# Altium PCB Electron.PcbDoc
Units mil, origin at the board's own origin, x right, y up, seen from the top; angles counter-clockwise.
Board outline 310 x 393.7 mil, 2 copper layers (Top1, Bottom2), stack 42.204 mil thick; 4 components, 28 nets, 68 pads, 19 vias.
Unrouted connection lines stored in the file: 8.
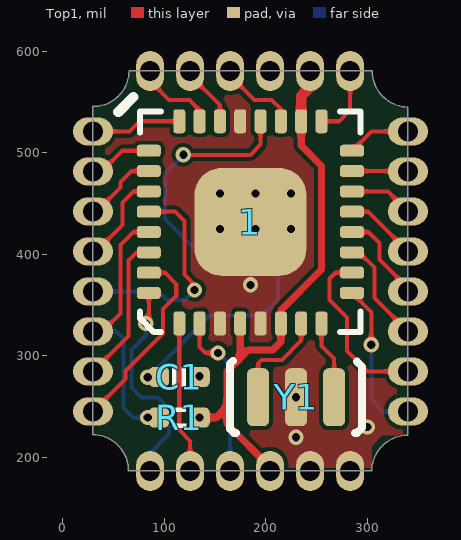
[diagram p0: Top1 view]
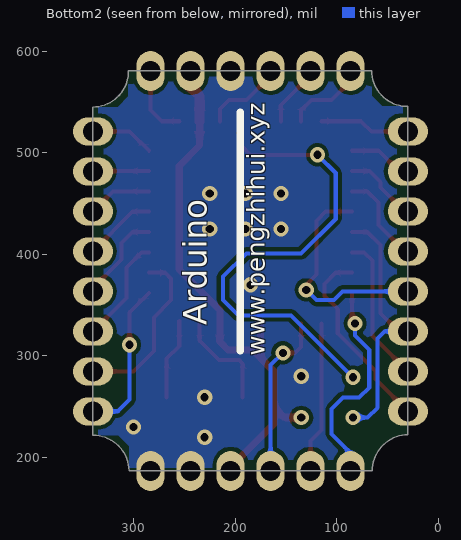
[diagram p1: Bottom2 view, seen from below]
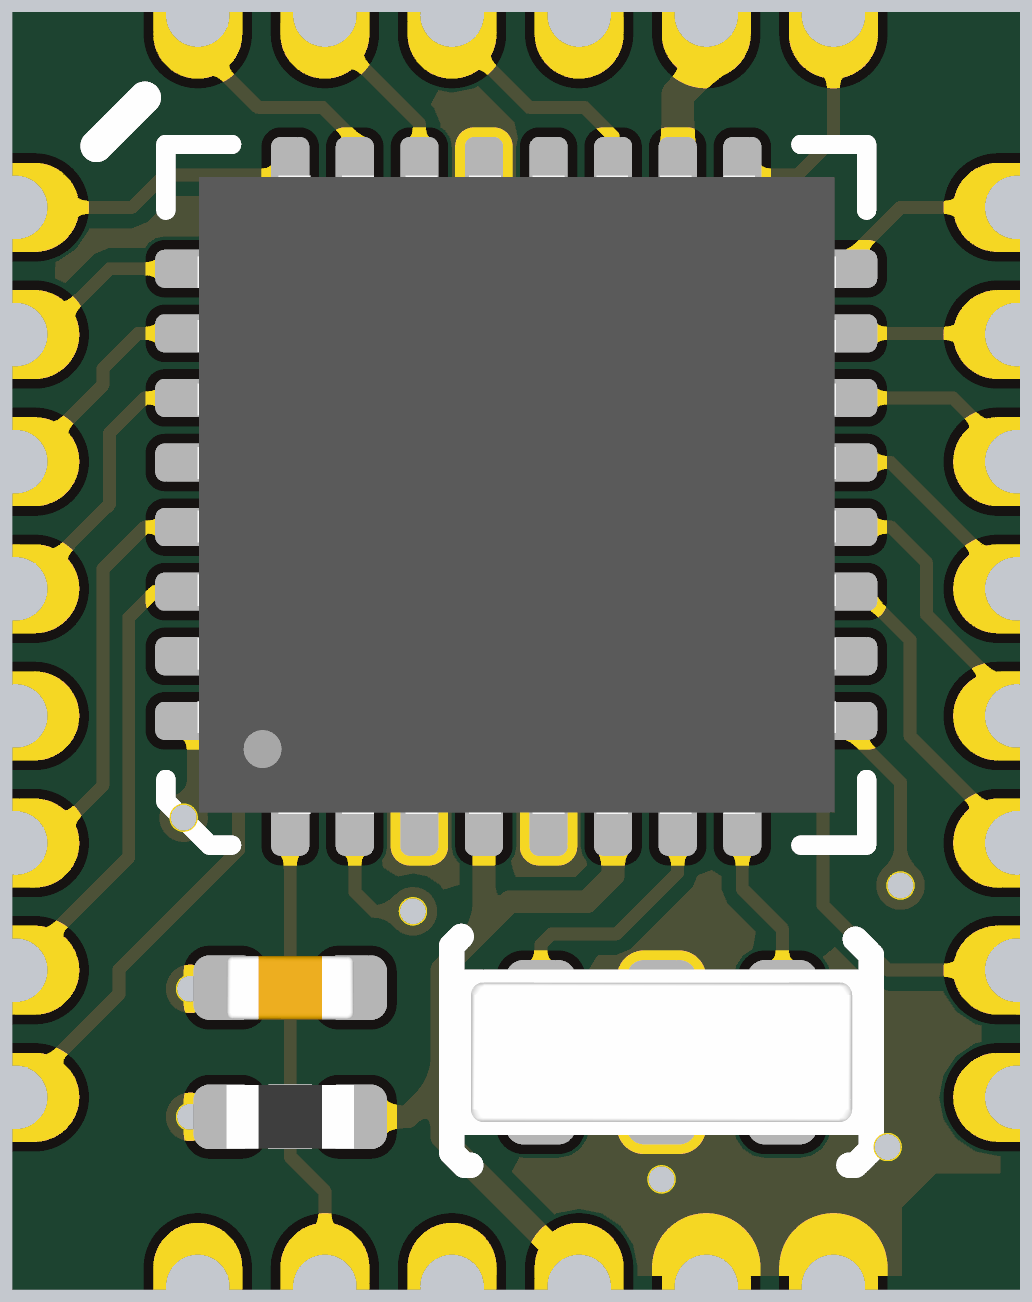
[diagram p2: 3D render of the assembled board from above, using the file's embedded part models]

## Layer stack, top to bottom
Top Solder: solder mask 0.394, Solder Resist, Dk 3.5
Top1: signal copper 1.417
Dielectric1: prepreg 39.3701, PP-006, Dk 4.1
Bottom2: signal copper 1.417
Bottom Solder: solder mask 0.394, Solder Resist, Dk 3.5

## Board outline
30,222.4 cw(c29.72,187.13) 65,186.85 304.45,186.85 cw(c339.72,186.57) 340,221.85 340,545 cw(c340.28,580.28) 305,580.55 65.55,580.55 cw(c30.28,580.83) 30,545.55

## Design rules (kind name [scope] priority, off if disabled: settings)
Clearance [All] p1: gap=4 ignorepadtopadclearanceinfootprint=FALSE except(0: Arc-Hole Track-Hole SMDPad-Hole THPad-Hole Via-Hole Fill-Hole Poly-Hole Region-Hole Text-Hole)
ComponentClearance [All] p1: gap=0 collisioncheckmode=3 verticalgap=0 showdistances=FALSE
DiffPairsRouting [All] p1: maxlimit=9 minlimit=9 mostfreqgap=9 toplayer_minwidth=15 toplayer_maxwidth=15 toplayer_prefwidth=15 bottomlayer_minwidth=15 bottomlayer_maxwidth=15 bottomlayer_prefwidth=15 maxuncoupledlength=500
FanoutControl Fanout_BGA [All] p1: bgadir=Out bgaviamode=Centered fanoutstyle=Auto fanoutdirection=Alternating viagrid=1 // Fanout_BGA (Default Rule)
HoleSize [All] p1: absolutevalues=TRUE maxlimit=10000 minlimit=8 maxpercent=80.000 minpercent=20.000
MinimumSolderMaskSliver [All] p1 off: minsoldermaskwidth=2
PlaneClearance [All] p1: clearance=8
PlaneConnect [All] p1: planeconnectstyle=Direct reliefexpansion=20 reliefentries=4 reliefconductorwidth=10 reliefairgap=10
PolygonConnect [All] p1: connectstyle=Direct reliefconductorwidth=10 reliefentries=4 polygonreliefangle="90 Angle" airgapwidth=10
RoutingVias [All] p1: holewidth=8 width=16 viastyle="Through Hole" minholewidth=6 minwidth=12 maxholewidth=28 maxwidth=50
SilkToSilkClearance [All] p1: silktosilkclearance=0
SilkToSolderMaskClearance [IsPad] p1: minsilkscreentomaskgap=0 clearancetoexposedcopper=TRUE
SolderMaskExpansion [All] p1: expansion=3
Width GND [(InNet('AGND') OR InNet('GND'))] p1: maxlimit=50 minlimit=4 preferedwidth=10
Width VCC [(InNet('VDD_SYS_3.3V') OR InNet('VDD_AV_3.3V') OR InNet('VDD_5V') OR InNet('VDD1V2-SYS') OR InNet('VDD1V1-EPHY') OR InNet('VDD-CPUX') OR InNet('VDD-CPUS') OR InNet('VDD-CPUFB') OR InNet('VCC-DRAM'))] p2: maxlimit=50 minlimit=4 preferedwidth=10
Width [All] p3: maxlimit=10000 minlimit=4 preferedwidth=4
21 further rules are at their usual default settings.

## Components (designator, comment, footprint, x,y, rotation, side; value= is the part's Value field where it differs from the comment)
1 "ATmega328P" QFN-32 185,432 r90 top
C1 "0.1uF" CAP_0402 115,279.37 r0 top value=0.1u
R1 "10K" RES_0402 115,239.37 r0 top value=22R
Y1 "8/16MHz" 晶振-3P 230,259.37 r0 top

## Footprints (in the part's own frame and the unit in brackets; to place one, negate y for a bottom-side part, rotate by r counter-clockwise, add the part's x,y. Pads: shape width x height; smd on the part's side, far side on the other; paste and mask are expansions set on the pad)
CAP_0402 [mil]
  rrect50% 20x20 smd: 1(-20,0) 2(20,0)
  silkscreen extent -6,-9 6,9, body extent -20,-10 20,10, height 20
QFN-32 [mm]
  rrect50% 0.6x0.3 smd: 1(-2.54,1.778) 2(-2.54,1.27) 3(-2.54,0.762) 4(-2.54,0.254) 5(-2.54,-0.254) 6(-2.54,-0.762) 7(-2.54,-1.27) 8(-2.54,-1.778) 17(2.515,-1.778) 18(2.515,-1.27) 19(2.515,-0.762) 20(2.515,-0.254) 21(2.515,0.254) 22(2.515,0.762) 23(2.515,1.27) 24(2.515,1.778)
  rrect50% 0.3x0.6 smd: 9(-1.778,-2.54) 10(-1.27,-2.54) 11(-0.762,-2.54) 12(-0.254,-2.54) 13(0.254,-2.54) 14(0.762,-2.54) 15(1.27,-2.54) 16(1.778,-2.54) 25(1.778,2.54) 26(1.27,2.54) 27(0.762,2.54) 28(0.254,2.54) 29(-0.254,2.54) 30(-0.762,2.54) 31(-1.27,2.54) 32(-1.778,2.54)
  rrect50% 2.7x2.8 smd: 33(0,0)
  silkscreen extent -2.76,-2.76 2.76,2.76, body extent -2.51,-2.51 2.51,2.51, height 0.85
RES_0402 [mil]
  rrect50% 20x20 smd: 1(-20,0) 2(20,0)
  silkscreen extent -6,-10 6,10, body extent -20,-10 20,10, height 14
晶振-3P [mm] "贴片晶振"
  rrect50% 0.55x1.45 smd: 1(-0.95,0) 2(0,0) 3(0.95,0)
  silkscreen extent -1.65,-0.89 1.65,0.91, body extent -1.65,-0.89 1.65,0.89, height 0.8

## Part data
1: "MCU"
C1: library part 电容-0402, "Capacitor"
R1: library part 电阻-0402, "Resistor"
Y1: library part 晶振-3Pin, "村田贴片"

## Free pads (board coordinates)
  oval 39.37x27.56 hole 19.68: 1(30,521) 2(30,481.63) 3(30,442.26) 4(30,402.89) 5(30,363.52) 6(30,324.15) 7(30,284.78) 8(30,245.41) 15(340,245.41) 16(340,284.78) 17(340,324.15) 18(340,363.52) 19(340,402.89) 20(340,442.26) 21(340,481.63) 22(340,521)
  oval 27.56x39.37 hole 19.68: 9(86.37,186.85) 10(125.74,186.85) 11(165.11,186.85) 12(204.48,186.85) 13(243.85,186.85) 14(283.22,186.85) 23(283.22,580.55) 24(243.85,580.55) 25(204.48,580.55) 26(165.11,580.55) 27(125.74,580.55) 28(86.37,580.55)

## Via types
v1: diameter 15, hole 8, Top1 to Bottom2, tented both sides, 19 vias

## Nets (pads, with @x,y where several pads share a name; then routed paths per layer and width w, separated by ;. In a path a pad name is that pad's centre, name@x,y a point inside that pad or via, vN(x,y) a via of type N, cw(c..) or ccw(c..) an arc to the next point about the centre after c; other vN are vias at no path point)
A0: 1.23 pad.28 | length 81.4
  Top1 w4: pad.28 86.37,570.63 105,552 125,552 135,542 1.23
A1: 1.24 pad.1 | length 89.1
  Top1 w4: pad.1 66,521 76,531 1.24
A2: 1.25 pad.2 | length 54.8
  Top1 w4: pad.2@38.63,481.63 59,502 1.25
A3: 1.26 pad.3 | length 71.1
  Top1 w4: pad.3@33.26,442.26 57,466 57,471 68,482 1.26
A4/SDA: 1.27 pad.4 | length 89.5
  Top1 w4: pad.4@32.89,402.89 59,429 59,451 70,462 1.27
A5/SCL: 1.28 pad.5 | length 217.1
  Top1 w4: 1.28 111,442 120,433 120,380 v1@132.5,367.5
  Bottom2 w4: pad.5 94.3,363.52 102.82,355 120,355 v1(130,365)
A6: 1.19 pad.26 | length 80.2
  Top1 w4: pad.26 165.11,575.89 189,552 206,552 215,543 1.19
A7: 1.22 pad.27 | length 61.7
  Top1 w4: pad.27 125.74,576.26 155,547 1.22
D0/RX: 1.30 pad.7 | length 147
  Top1 w4: pad.7 65,319.78 65,394 73,402 1.30
D1/TX: 1.31 pad.8 | length 191.1
  Top1 w4: pad.8 62,277.41 62,285 99,322 99,346 112,359 112,371 101,382 1.31
D2: 1.32 pad.9 | length 197.1
  Top1 w4: v1(82,332) 85,335 1.32
  Bottom2 w4: v1(82,332) 82,320 68,306 68,269 78,259 94,259 105,248 105,223 pad.9@86.37,204.37
D3~: 1.1 pad.10 | length 149.6
  Top1 w4: 1.1 115,227 125.74,216.26 pad.10
D4: 1.2 pad.11 | length 164.7
  Top1 w4: 1.2 135,309 141,303 v1(153,303)
  Bottom2 w4: v1(153,303) 165.11,290.89 pad.11
D5~: 1.9 pad.15 | length 153.7
  Top1 w4: 1.9 304,343 v1(304,311)
  Bottom2 w4: v1(304,311) 304,257 315.59,245.41 pad.15
D6~: 1.10 pad.16 | length 170.9
  Top1 w4: 1.10 269,382 263,376 263,355 280,338 280,305 300.22,284.78 pad.16
D7: 1.11 pad.17 | length 104.7
  Top1 w4: 1.11 292,402 307,387 307,357.15 pad.17
D8: 1.12 pad.18 | length 90.6
  Top1 w4: 1.12 301,422 312,411 312,395 340,367 pad.18
D9~: 1.13 pad.19 | length 71.2
  Top1 w4: 1.13 300.89,442 pad.19
D10~/CS: 1.14 pad.20 | length 63.2
  Top1 w4: 1.14 320.26,462 pad.20
D11~/MOSI: 1.15 pad.21 | length 54.6
  Top1 w4: 1.15 pad.21@339.63,482
D12/MISO: 1.16 pad.22 | length 62.9
  Top1 w4: 1.16 304,521 pad.22
D13/SCK: 1.17 pad.23 | length 71.2
  Top1 w4: 1.17 272,531 283.22,542.22 pad.23
GND: 1.3 1.5 1.21 1.33 C1.2 pad.13 pad.14 pad.25 Y1.2
  other v1: 230,220 300,230 230,259.37 135,280 185,370 155,425 190,425 225,425 155,460 190,460 225,460
Net1_7: 1.7 Y1.1 | length 104.3
  Top1 w4: Y1.1 192.6,292.6 196,296 216,296 235,315 1.7 1.7@235,334.37
Net1_8: 1.8 Y1.3 | length 80.1
  Top1 w4: 1.8@255,334.37 255,310 267.4,297.6 Y1.3
Net1_20: 1.20 C1.1 | length 490.6
  Top1 w4: v1(119,498) 185,498 195,508 1.20
  Bottom2 w4: v1(84,279) 145,340 196.82,340 212,355.18 212,378 189,401 135,401 101,435 101,480 v1(119,498)
RESET#: 1.29 pad.6 R1.1 | length 254.6
  Top1 w4: pad.6@39.15,324.15 57,342 57,409 70,422 1.29
  Bottom2 w4: pad.6 52.85,324.15 60,317 60,249 69.63,239.37 v1(84,239.37)
VCC: 1.4 1.6 1.18 pad.12 pad.24 R1.2 | length 539.9
  Top1 w7: v1(135,239.37) 151.37,239.37 162,250 ; 1.4@175,334.37 1.4 175,298 ; pad.12@204.48,190.52 162,233 162,250 ; 1.18 235,507 255,487 255,385 215,345 1.6 215,314 207,306 183,306 175,298 ; 162,250 162,285 175,298
  Top1 w10: 1.18 235,556 243.85,564.85 pad.24

## Polygon pours and split planes (outlines as drawn)
GND on Top1 "Top1-GND" (solid, remove dead copper, pour order 2): 35,575 335,575 335,190 35,190
GND on Bottom2 "Bottom2-GND" (solid, remove dead copper, pour order 4): 35,575 335,575 335,190 35,190

## Other copper
Top1:
  pour cut-out: 65,187.4 30,222.4 54.45,222.4 65,211.85
  pour cut-out: 339.45,221.85 304.45,186.85 304.45,211.3 315,221.85
  pour cut-out: 305,580 340,545 315.55,545 305,555.55
  pour cut-out: 30.55,545.55 65.55,580.55 65.55,556.1 55,545.55
  pour cut-out: 70,580.55
  pour cut-out: 65.55,580.55
Bottom2:
  pour cut-out: 65,187.4 30,222.4 54.45,222.4 65,211.85
  pour cut-out: 339.45,221.85 304.45,186.85 304.45,211.3 315,221.85
  pour cut-out: 305,580 340,545 315.55,545 305,555.55
  pour cut-out: 30.55,545.55 65.55,580.55 65.55,556.1 55,545.55

## Silkscreen, mask and mechanical layers (free items; w line width, h text height)
Top Overlay:
  lines w10: 55,540 70,555
Bottom Overlay:
  lines w7: 195,305 195,540
  text "Arduino" at 220,330 h40 r270
  text "www.pengzhihui.xyz" at 165,300 h30 r270
Bottom Solder:
  text "[Electron]" at 270,324.15 h50 r270
Mechanical 1:
  the board outline again, w5